# EAGLE board Hardware (EAGLE 9.7.0)

Size 826.74 x 493.83 mm. Coordinates in mm from the lower left corner, seen from the top.
Outline: 0,0 826.74,0 826.74,493.83 0,493.83 0,0
Copper layers (1*16): Top 0.035mm / dielectric 1.5mm / Bottom 0.035mm
Design rules "default": minimum track width 6mil, minimum drill 0.35mm, track to track 6mil, track to pad 6mil, pad to pad 6mil, via to via 6mil, smd to smd 6mil, copper to edge 40mil, drill to drill 6mil, minimum pad ring 10mil, minimum via ring 8mil, stop-mask expansion 4mil, vias tented up to drill 0mil, thermal gap 10mil

## Footprints (pad centres in the part's own frame; a part is rotated, then mirrored left to right if it is on the bottom)
LED-RGB-5MM = drill 0.9: B 0.635,0.635; C -0.635,-0.635; G 1.905,-0.635; R -1.905,0.635
28015 = drill 1.016 long: 1 -2.54,0; 2 0,0; 3 2.54,0
RESAD1016W63L850D250B = drill 0.83 pad 1.43: 1 -5.08,0; 2 5.08,0
ARDUINO-UNO-R3-SHIELD = drill 1.016 pad 1.88: 3.3V 24.13,-2.54; 5V 24.13,0; A0 24.13,12.7; A1 24.13,15.24; A2 24.13,17.78; A3 24.13,20.32; A4 24.13,22.86; A5 24.13,25.4; AREF -24.13,-13.97; D2 -24.13,20.32; D3 -24.13,17.78; D4 -24.13,15.24; D5 -24.13,12.7; D6 -24.13,10.16; D7 -24.13,7.62; D8 -24.13,3.81; D9 -24.13,1.27; D10 -24.13,-1.27; D11 -24.13,-3.81; D12 -24.13,-6.35; D13 -24.13,-8.89; GND@0 24.13,2.54; GND@1 24.13,5.08; GND@2 -24.13,-11.43; IOREF 24.13,-7.62; NC 24.13,-10.16; RES 24.13,-5.08; RX -24.13,25.4; SCL -24.13,-19.05; SDA -24.13,-16.51; TX -24.13,22.86; VIN 24.13,7.62

## Placement (x,y rotation side)
D1  LED-RGBRCBG-PTH  [LED-RGB-5MM]  386.78,244.36 270 top
D2  LED-RGBRCBG-PTH  [LED-RGB-5MM]  284.42,372.57 0 top
D3  LED-RGBRCBG-PTH  [LED-RGB-5MM]  191.23,249.62 90 top
D4  LED-RGBRCBG-PTH  [LED-RGB-5MM]  292.41,126.99 180 top
D5  LED-RGBRCBG-PTH  [LED-RGB-5MM]  730.23,179.86 0 top
D6  LED-RGBRCBG-PTH  [LED-RGB-5MM]  760.03,150.28 0 top
D7  LED-RGBRCBG-PTH  [LED-RGB-5MM]  699.05,151.64 0 top
D8  LED-RGBRCBG-PTH  [LED-RGB-5MM]  730.6,128.67 0 top
PING1  DISTANCE-SENSOR-3PIN  [28015]  276.87,415.76 0 top
PING2  DISTANCE-SENSOR-3PIN  [28015]  277.57,483.67 0 top
PING3  DISTANCE-SENSOR-3PIN  [28015]  468.25,247.92 270 top
PING4  DISTANCE-SENSOR-3PIN  [28015]  588.83,245.42 270 top
PING5  DISTANCE-SENSOR-3PIN  [28015]  104.04,247.09 90 top
PING6  DISTANCE-SENSOR-3PIN  [28015]  10.16,249.17 90 top
PING7  DISTANCE-SENSOR-3PIN  [28015]  284.99,76.85 180 top
PING8  DISTANCE-SENSOR-3PIN  [28015]  288.18,10.16 180 top
R1  500  [RESAD1016W63L850D250B]  333.41,318.02 270 top
R2  500  [RESAD1016W63L850D250B]  220.34,259.03 90 top
R3  500  [RESAD1016W63L850D250B]  328.14,279.75 180 top
R4  500  [RESAD1016W63L850D250B]  363.6,213.03 180 top
R5  500  [RESAD1016W63L850D250B]  645.62,109.12 270 top
R6  500  [RESAD1016W63L850D250B]  666.04,109.31 270 top
R7  500  [RESAD1016W63L850D250B]  820.41,105.33 270 top
R8  500  [RESAD1016W63L850D250B]  801.14,105.33 270 top
U1  ARDUINO-UNO-R3-SHIELD  [ARDUINO-UNO-R3-SHIELD]  290.99,314.51 270 top
U2  ARDUINO-UNO-R3-SHIELD  [ARDUINO-UNO-R3-SHIELD]  283.94,187.34 90 top
U3  ARDUINO-UNO-R3-SHIELD  [ARDUINO-UNO-R3-SHIELD]  731.51,72.67 270 top

## Library data of the parts
D1-D8 PING1-PING8 R1-R8 U1-U3 = Tinkercad

## Nets
D1_C: D1.C R3.1
D2_C: D2.C R1.1
D3_C: D3.C R2.1
D4_C: D4.C R4.1
D5_C: D5.C R8.1
D6_C: D6.C R7.1
D7_C: D7.C R5.1
D8_C: D8.C R6.1
U1_D5: D2.R U1.D5
U1_D6: D4.G U1.D6
U1_D7: D4.R U1.D7
U1_D8: D1.G U1.D8
U1_D9: D1.R U1.D9
U1_D10: D3.G U1.D10
U1_D11: D3.R U1.D11
U1_D12: D2.G U1.D12
U1_GND: PING1.1 PING2.1 PING3.1 PING4.1 PING5.1 PING6.1 PING7.1 PING8.1 R1.2 R2.2 R3.2 R4.2 R5.2 R6.2 R7.2 R8.2 U1.GND@0 U1.GND@1 U1.GND@2 U2.GND@0 U2.GND@1 U2.GND@2 U3.GND@0 U3.GND@1 U3.GND@2
U2_5V: PING1.2 PING2.2 PING3.2 PING4.2 PING5.2 PING6.2 PING7.2 PING8.2 U2.5V
U2_A4: U1.A4 U2.A4 U3.A4
U2_A5: U1.A5 U2.A5 U3.A5
U2_D6: PING4.3 U2.D6
U2_D7: PING3.3 U2.D7
U2_D8: PING2.3 U2.D8
U2_D9: PING1.3 U2.D9
U2_D10: PING8.3 U2.D10
U2_D11: PING7.3 U2.D11
U2_D12: PING6.3 U2.D12
U2_D13: PING5.3 U2.D13
U3_D5: D8.R U3.D5
U3_D6: D6.G U3.D6
U3_D7: D6.R U3.D7
U3_D8: D5.G U3.D8
U3_D9: D5.R U3.D9
U3_D10: D7.G U3.D10
U3_D11: D7.R U3.D11
U3_D12: D8.G U3.D12

## Tracks (layer width: path | path; a pad name or v marks a point on that pad's centre or on a via)
D1_C  (1 unrouted)
D2_C  (1 unrouted)
D3_C  (1 unrouted)
D4_C  (1 unrouted)
D5_C  (1 unrouted)
D6_C  (1 unrouted)
D7_C  (1 unrouted)
D8_C  (1 unrouted)
U1_D5  (1 unrouted)
U1_D6  (1 unrouted)
U1_D7  (1 unrouted)
U1_D8  (1 unrouted)
U1_D9  (1 unrouted)
U1_D10  (1 unrouted)
U1_D11  (1 unrouted)
U1_D12  (1 unrouted)
U1_GND  (24 unrouted)
U2_5V  (8 unrouted)
U2_A4  (2 unrouted)
U2_A5  (2 unrouted)
U2_D6  (1 unrouted)
U2_D7  (1 unrouted)
U2_D8  (1 unrouted)
U2_D9  (1 unrouted)
U2_D10  (1 unrouted)
U2_D11  (1 unrouted)
U2_D12  (1 unrouted)
U2_D13  (1 unrouted)
U3_D5  (1 unrouted)
U3_D6  (1 unrouted)
U3_D7  (1 unrouted)
U3_D8  (1 unrouted)
U3_D9  (1 unrouted)
U3_D10  (1 unrouted)
U3_D11  (1 unrouted)
U3_D12  (1 unrouted)